# EAGLE board Matrix - Copy (EAGLE 8.2.2)
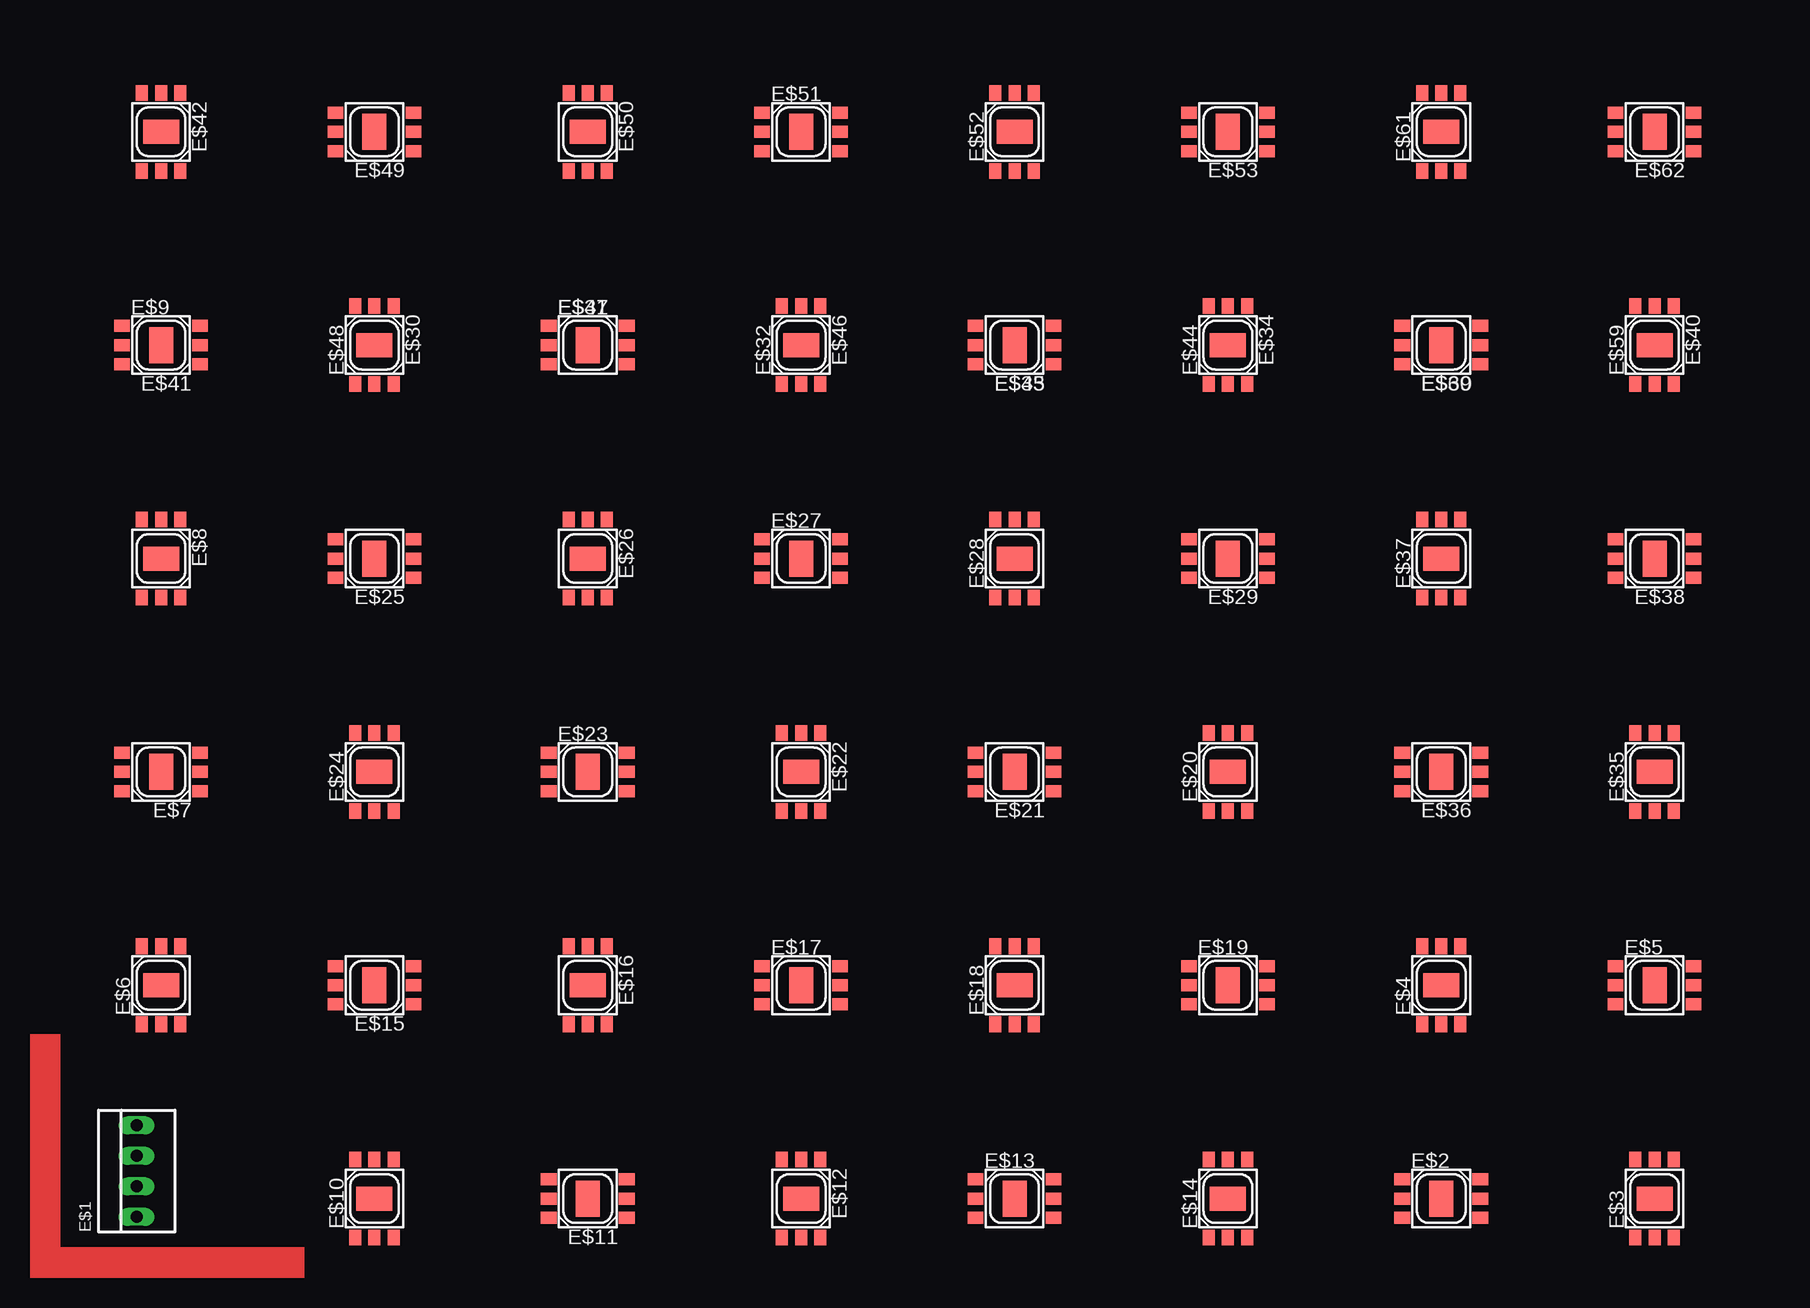
[diagram p0: board, top side]
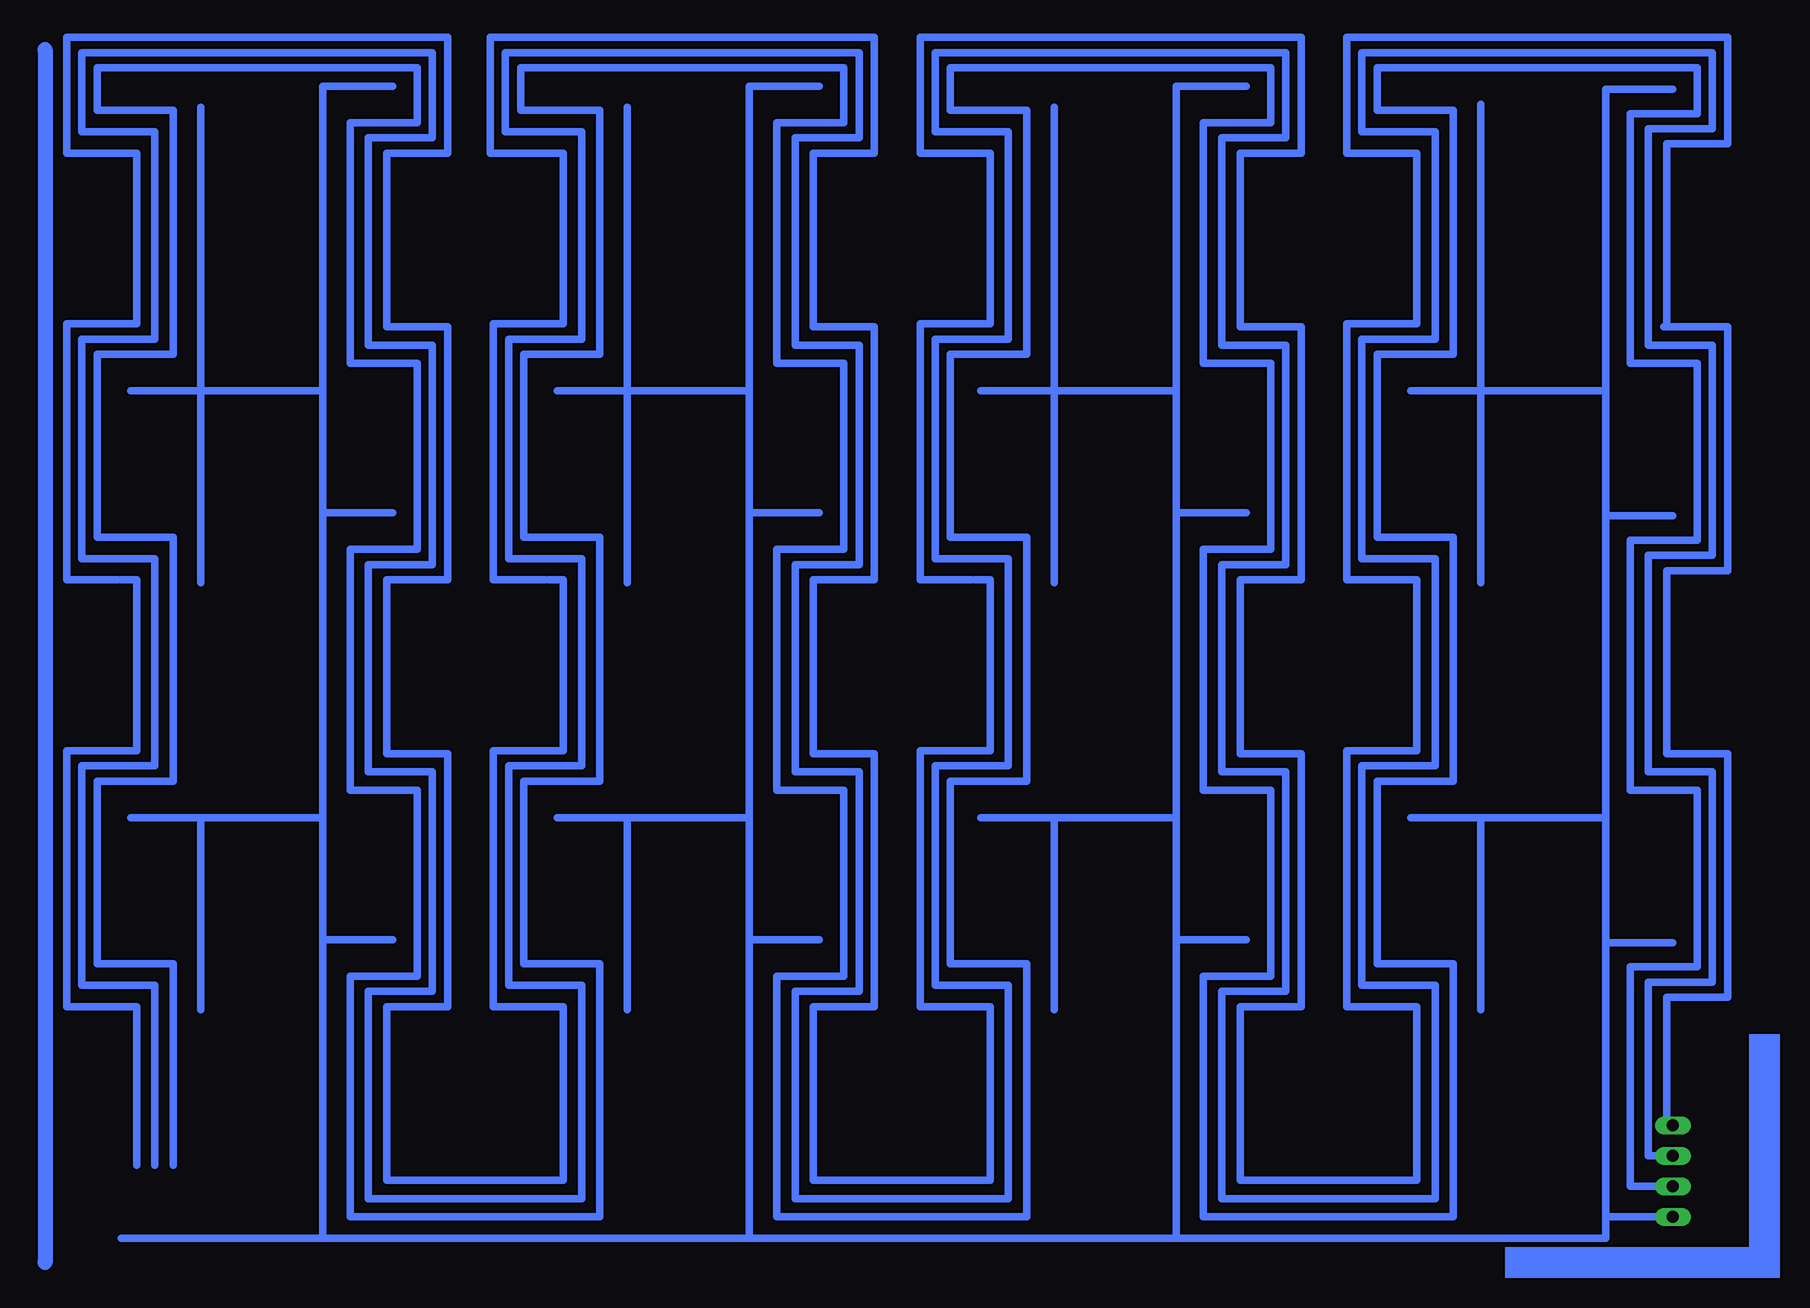
[diagram p1: board, bottom side, seen from below]

No outline drawn. Coordinates in mm, seen from the top.
Copper layers (1*16): Top 0.035mm / dielectric 1.5mm / Bottom 0.035mm
Design rules "default": minimum track width 10mil, minimum drill 24mil, track to track 8mil, track to pad 8mil, pad to pad 8mil, via to via 8mil, smd to smd 8mil, copper to edge 40mil, drill to drill 8mil, minimum pad ring 10mil, minimum via ring 8mil, stop-mask expansion 4mil, vias tented up to drill 0mil, thermal gap 10mil

## Footprints (pad centres in the part's own frame; a part is rotated, then mirrored left to right if it is on the bottom)
22-23-2041 = drill 1 long: 1 -3.81,0; 2 -1.27,0; 3 1.27,0; 4 3.81,0
LP2C63-ST-RGB-SR0 = smd 1.3 x 1: 1 -3.25,1.6; 2 -3.25,0; 3 -3.25,-1.6; 4 3.25,-1.6; 5 3.25,0; 6 3.25,1.6 | smd 2 x 3: TH 0,0

## Placement (x,y rotation side)
E$1  [22-23-2041]  8.89,8.89 90 top
E$2  [LP2C63-ST-RGB-SR0]  117.6,6.6 0 top
E$3  [LP2C63-ST-RGB-SR0]  135.38,6.6 90 top
E$4  [LP2C63-ST-RGB-SR0]  117.6,24.38 90 top
E$5  [LP2C63-ST-RGB-SR0]  135.38,24.38 0 top
E$6  [LP2C63-ST-RGB-SR0]  10.92,24.38 90 top
E$7  [LP2C63-ST-RGB-SR0]  10.92,42.16 180 top
E$8  [LP2C63-ST-RGB-SR0]  10.92,59.94 270 top
E$9  [LP2C63-ST-RGB-SR0]  10.92,77.72 0 top
E$10  [LP2C63-ST-RGB-SR0]  28.7,6.6 90 top
E$11  [LP2C63-ST-RGB-SR0]  46.48,6.6 180 top
E$12  [LP2C63-ST-RGB-SR0]  64.26,6.6 270 top
E$13  [LP2C63-ST-RGB-SR0]  82.04,6.6 0 top
E$14  [LP2C63-ST-RGB-SR0]  99.82,6.6 90 top
E$15  [LP2C63-ST-RGB-SR0]  28.7,24.38 180 top
E$16  [LP2C63-ST-RGB-SR0]  46.48,24.38 270 top
E$17  [LP2C63-ST-RGB-SR0]  64.26,24.38 0 top
E$18  [LP2C63-ST-RGB-SR0]  82.04,24.38 90 top
E$19  [LP2C63-ST-RGB-SR0]  99.82,24.38 0 top
E$20  [LP2C63-ST-RGB-SR0]  99.82,42.16 90 top
E$21  [LP2C63-ST-RGB-SR0]  82.04,42.16 180 top
E$22  [LP2C63-ST-RGB-SR0]  64.26,42.16 270 top
E$23  [LP2C63-ST-RGB-SR0]  46.48,42.16 0 top
E$24  [LP2C63-ST-RGB-SR0]  28.7,42.16 90 top
E$25  [LP2C63-ST-RGB-SR0]  28.7,59.94 180 top
E$26  [LP2C63-ST-RGB-SR0]  46.48,59.94 270 top
E$27  [LP2C63-ST-RGB-SR0]  64.26,59.94 0 top
E$28  [LP2C63-ST-RGB-SR0]  82.04,59.94 90 top
E$29  [LP2C63-ST-RGB-SR0]  99.82,59.94 180 top
E$30  [LP2C63-ST-RGB-SR0]  28.7,77.72 270 top
E$31  [LP2C63-ST-RGB-SR0]  46.48,77.72 0 top
E$32  [LP2C63-ST-RGB-SR0]  64.26,77.72 90 top
E$33  [LP2C63-ST-RGB-SR0]  82.04,77.72 180 top
E$34  [LP2C63-ST-RGB-SR0]  99.82,77.72 270 top
E$35  [LP2C63-ST-RGB-SR0]  135.38,42.16 90 top
E$36  [LP2C63-ST-RGB-SR0]  117.6,42.16 180 top
E$37  [LP2C63-ST-RGB-SR0]  117.6,59.94 90 top
E$38  [LP2C63-ST-RGB-SR0]  135.38,59.94 180 top
E$39  [LP2C63-ST-RGB-SR0]  117.6,77.72 180 top
E$40  [LP2C63-ST-RGB-SR0]  135.38,77.72 270 top
E$41  [LP2C63-ST-RGB-SR0]  10.92,77.72 180 top
E$42  [LP2C63-ST-RGB-SR0]  10.92,95.5 270 top
E$44  [LP2C63-ST-RGB-SR0]  99.82,77.72 90 top
E$45  [LP2C63-ST-RGB-SR0]  82.04,77.72 180 top
E$46  [LP2C63-ST-RGB-SR0]  64.26,77.72 270 top
E$47  [LP2C63-ST-RGB-SR0]  46.48,77.72 0 top
E$48  [LP2C63-ST-RGB-SR0]  28.7,77.72 90 top
E$49  [LP2C63-ST-RGB-SR0]  28.7,95.5 180 top
E$50  [LP2C63-ST-RGB-SR0]  46.48,95.5 270 top
E$51  [LP2C63-ST-RGB-SR0]  64.26,95.5 0 top
E$52  [LP2C63-ST-RGB-SR0]  82.04,95.5 90 top
E$53  [LP2C63-ST-RGB-SR0]  99.82,95.5 180 top
E$59  [LP2C63-ST-RGB-SR0]  135.38,77.72 90 top
E$60  [LP2C63-ST-RGB-SR0]  117.6,77.72 180 top
E$61  [LP2C63-ST-RGB-SR0]  117.6,95.5 90 top
E$62  [LP2C63-ST-RGB-SR0]  135.38,95.5 180 top

## Library data of the parts
E$1 = con-molex
E$2-E$42 E$44-E$53 E$59-E$62 = led

## Tracks (layer width: path | path; a pad name or v marks a point on that pad's centre or on a via)
S$1
  Bottom 1.27: 144.53,102.36 144.53,1.27
S$5
  Bottom 0.61: 30.23,79.5 36.07,79.5 36.07,58.17 30.23,58.17 30.23,44.96
S$6
  Bottom 0.61: 85.85,3.3 121.41,3.3 | 121.41,3.3 138.18,3.3 | 121.41,3.3 121.41,28.19 | 121.41,28.19 121.41,38.35 | 121.41,38.35 121.41,63.75 | 121.41,63.75 121.41,73.91 | 121.41,73.91 121.41,79.76 | 137.41,73.91 131.57,73.91 | 121.41,73.91 127.25,73.91 131.57,73.91 | 137.41,38.35 131.57,38.35 | 131.57,38.35 121.41,38.35 | 115.57,28.19 121.41,28.19 | 115.57,63.75 121.41,63.75 | 131.57,57.91 131.57,73.91 | 131.57,22.35 131.57,38.35 | 131.57,97.54 131.57,73.91
S$7
  Bottom 0.61: 114.3,8.13 116.08,8.13 116.08,21.08
S$8
  Bottom 0.61: 114.3,6.6 117.6,6.6 117.6,21.34
S$9
  Bottom 0.61: 114.3,5.08 119.13,5.08 119.13,21.34
S$10
  Bottom 0.61: 114.3,8.13 116.08,8.13
S$11
  Bottom 0.61: 111,23.37 111,43.69 114.81,43.69
S$12
  Bottom 0.61: 79.25,77.72 76.71,77.72 76.71,60.2
S$13
  Bottom 0.61: 78.74,8.13 80.52,8.13
S$14
  Bottom 0.61: 78.74,8.13 80.52,8.13 80.52,21.08
S$15
  Bottom 0.61: 78.74,6.6 82.04,6.6 82.04,21.34
S$16
  Bottom 0.61: 78.74,5.08 83.57,5.08 83.57,21.34
S$17
  Bottom 0.61: 7.62,43.69 9.4,43.69 9.4,58.93 4.32,58.93 4.32,79.25 9.65,79.25
S$18
  Bottom 0.61: 7.62,42.16 10.92,42.16 10.92,60.2 5.59,60.2 5.59,77.72 10.92,77.72
S$19
  Bottom 0.61: 7.62,40.64 12.45,40.64 12.45,61.47 6.86,61.47 6.86,76.2 12.19,76.2
S$20
  Bottom 0.61: 43.18,8.13 44.96,8.13 44.96,22.61 39.88,22.61 39.88,43.69 43.69,43.69
S$21
  Bottom 0.61: 43.18,6.6 46.48,6.6 46.48,23.88 41.15,23.88 41.15,42.16 43.69,42.16
S$22
  Bottom 0.61: 43.18,5.08 48.01,5.08 48.01,25.15 42.42,25.15 42.42,40.64 43.69,40.64
S$23
  Bottom 0.61: 43.18,43.69 44.96,43.69 44.96,58.17 39.88,58.17 39.88,79.25 43.69,79.25
S$24
  Bottom 0.61: 43.18,42.16 46.48,42.16 46.48,59.44 41.15,59.44 41.15,77.72 43.69,77.72
S$25
  Bottom 0.61: 43.18,40.64 48.01,40.64 48.01,60.71 42.42,60.71 42.42,76.2 43.69,76.2
S$26
  Bottom 0.61: 75.44,23.37 75.44,43.69 79.25,43.69
S$27
  Bottom 0.61: 78.74,6.6 82.04,6.6
S$28
  Bottom 0.61: 78.74,5.08 83.57,5.08
S$29
  Bottom 0.61: 75.44,58.93 75.44,79.25 79.25,79.25
S$30
  Bottom 0.61: 78.74,42.16 82.04,42.16
S$31
  Bottom 0.61: 79.25,76.2 77.98,76.2 77.98,61.47
S$32
  Bottom 0.61: 78.74,40.64 83.57,40.64
S$33
  Bottom 0.61: 28.7,78.23 34.8,78.23 34.8,59.94 28.7,59.94 28.7,44.96
S$34
  Bottom 0.61: 27.18,76.96 33.53,76.96 33.53,61.72 27.18,61.72 27.18,44.96
S$35
  Bottom 0.61: 39.88,79.25 44.96,79.25
S$36
  Bottom 0.61: 30.23,49.53 30.23,43.94 36.07,43.94 36.07,22.61 30.23,22.61 30.23,10.16 30.23,9.4 30.23,8.13 43.18,8.13 43.94,8.13 44.96,8.13 44.96,21.08
S$37
  Bottom 0.61: 28.7,48.26 28.7,42.67 34.8,42.67 34.8,24.38 28.7,24.38 28.7,9.91 28.7,9.4 28.7,6.6 43.18,6.6 43.69,6.6 46.48,6.6 46.48,21.34
S$38
  Bottom 0.61: 27.18,46.99 27.18,41.4 33.53,41.4 33.53,26.16 27.18,26.16 27.18,9.65 27.18,9.4 27.18,5.08 43.18,5.08 44.45,5.08 48.01,5.08 48.01,21.34
S$39
  Bottom 0.61: 30.23,44.96 30.23,49.53
S$41
  Bottom 0.61: 64.26,78.23 70.36,78.23 70.36,59.94 64.26,59.94 64.26,44.96
S$42
  Bottom 0.61: 62.74,76.96 69.09,76.96 69.09,61.72 62.74,61.72 62.74,44.96
S$43
  Bottom 0.61: 80.52,8.13 80.52,22.61 75.44,22.61 75.44,43.69 79.25,43.69
S$44
  Bottom 0.61: 82.04,6.6 82.04,23.88 76.71,23.88 76.71,42.16 79.25,42.16
S$45
  Bottom 0.61: 83.57,5.08 83.57,25.15 77.98,25.15 77.98,40.64 79.25,40.64
S$46
  Bottom 0.61: 78.74,43.69 80.52,43.69 80.52,58.17 75.44,58.17 75.44,79.25 79.25,79.25
S$47
  Bottom 0.61: 78.74,42.16 82.04,42.16 82.04,59.44 76.71,59.44 76.71,77.72 79.25,77.72
S$48
  Bottom 0.61: 78.74,40.64 83.57,40.64 83.57,60.71 77.98,60.71 77.98,76.2 79.25,76.2
S$49
  Bottom 0.61: 41.15,77.72 46.48,77.72
S$50
  Bottom 0.61: 80.52,21.08 80.52,8.13 65.79,8.13 65.79,22.61 71.63,22.61 71.63,43.94 65.79,43.94 65.79,44.96 65.79,45.59 65.79,58.17 67.06,58.17
S$51
  Bottom 0.61: 64.26,48.26 64.26,42.67 70.36,42.67 70.36,24.38 64.26,24.38 64.26,9.91 64.26,9.4 64.26,6.6 78.74,6.6 79.25,6.6 82.04,6.6 82.04,21.34
S$52
  Bottom 0.61: 78.74,43.69 80.52,43.69
S$53
  Bottom 0.61: 79.25,42.16 76.71,42.16 76.71,24.64
S$54
  Bottom 0.61: 79.25,40.64 77.98,40.64 77.98,25.91
S$55
  Bottom 0.61: 62.74,46.99 62.74,41.4 69.09,41.4 69.09,26.16 62.74,26.16 62.74,9.65 62.74,9.4 62.74,5.08 78.74,5.08 80.01,5.08 83.57,5.08 83.57,21.34
S$56
  Bottom 0.61: 102.87,58.17 107.19,58.17 107.19,79.5 101.35,79.5 101.35,80.52 101.35,81.41 101.35,93.73 102.62,93.73
S$57
  Bottom 0.61: 99.82,78.23 105.92,78.23 105.92,59.94 99.82,59.94 99.82,44.96
S$58
  Bottom 0.61: 50.29,3.3 14.48,3.3 14.48,5.08 | 50.29,3.3 85.85,3.3 | 85.85,3.3 102.62,3.3 | 14.48,5.08 14.48,27.94 | 14.48,27.94 14.48,38.35 | 14.48,38.35 14.48,63.5 | 14.48,63.5 14.48,73.91 | 14.48,73.91 14.48,79.76 | 30.48,73.91 24.89,73.91 | 24.89,73.91 14.48,73.91 | 30.73,38.35 24.89,38.35 | 24.89,38.35 14.48,38.35 | 50.29,3.3 50.29,28.19 | 50.29,28.19 50.29,38.35 | 50.29,38.35 50.29,63.75 | 50.29,63.75 50.29,73.91 | 50.29,73.91 50.29,80.01 | 66.29,73.91 60.45,73.91 | 60.45,73.91 50.29,73.91 | 66.55,38.35 60.45,38.35 | 60.45,38.35 50.29,38.35 | 85.85,3.3 85.85,28.19 | 85.85,28.19 85.85,38.35 | 85.85,38.35 85.85,63.75 | 85.85,63.75 85.85,73.91 | 85.85,73.91 85.85,79.76 | 101.85,73.91 96.01,73.91 | 85.85,73.91 91.44,73.91 96.01,73.91 | 101.85,38.35 96.01,38.35 | 96.01,38.35 85.85,38.35 | 8.89,63.5 14.48,63.5 | 8.89,27.94 14.48,27.94 | 24.89,22.35 24.89,38.35 | 24.89,58.17 24.89,73.91 | 44.45,63.75 50.29,63.75 | 44.45,28.19 50.29,28.19 | 60.45,22.35 60.45,38.35 | 60.45,57.91 60.45,73.91 | 80.01,28.19 85.85,28.19 | 80.01,63.75 85.85,63.75 | 96.01,57.91 96.01,73.91 | 96.01,22.35 96.01,38.35 | 8.89,5.08 14.48,5.08 | 60.45,97.54 60.45,73.91 | 96.01,97.54 96.01,73.91
S$59
  Bottom 0.61: 98.3,76.96 104.65,76.96 104.65,61.72 98.3,61.72 98.3,44.96
S$60
  Bottom 0.61: 114.81,42.16 112.27,42.16 112.27,24.64
S$61
  Bottom 0.61: 114.3,6.6 117.6,6.6
S$63
  Bottom 0.61: 114.81,40.64 113.54,40.64 113.54,25.91
S$64
  Bottom 0.61: 42.42,76.2 47.75,76.2
S$65
  Bottom 0.61: 101.35,9.4 101.35,22.61 107.19,22.61 107.19,43.94 101.35,43.94 101.35,44.96 101.35,46.48 101.35,58.17 102.62,58.17
S$66
  Bottom 0.61: 99.82,48.26 99.82,42.67 105.92,42.67 105.92,24.38 99.82,24.38 99.82,9.4
S$67
  Bottom 0.61: 98.3,46.99 98.3,41.4 104.65,41.4 104.65,26.16 98.3,26.16 98.3,9.4
S$68
  Bottom 0.61: 114.3,5.08 119.13,5.08
S$69
  Bottom 0.61: 114.3,43.69 116.08,43.69
S$70
  Bottom 0.61: 111,58.93 111,79.25 114.81,79.25
S$71
  Bottom 0.61: 114.81,77.72 112.27,77.72 112.27,60.2
S$72
  Bottom 0.61: 114.3,42.16 117.6,42.16
S$73
  Bottom 0.61: 114.81,76.2 113.54,76.2 113.54,61.47
S$74
  Bottom 0.61: 114.3,40.64 119.13,40.64
S$75
  Bottom 0.61: 116.08,8.13 116.08,22.61 111,22.61 111,43.69 114.81,43.69
S$76
  Bottom 0.61: 117.6,6.6 117.6,23.88 112.27,23.88 112.27,42.16 114.81,42.16
S$77
  Bottom 0.61: 119.13,5.08 119.13,25.15 113.54,25.15 113.54,40.64 114.81,40.64
S$78
  Bottom 0.61: 114.3,43.69 116.08,43.69 116.08,58.17 111,58.17 111,79.25 114.81,79.25
S$79
  Bottom 0.61: 114.3,42.16 117.6,42.16 117.6,59.44 112.27,59.44 112.27,77.72 114.81,77.72
S$80
  Bottom 0.61: 114.3,40.64 119.13,40.64 119.13,60.71 113.54,60.71 113.54,76.2 114.81,76.2
S$81
  Bottom 0.61: 116.08,21.08 116.08,8.13 115.06,8.13 114.3,8.13 101.35,8.13 101.35,9.4
S$82
  Bottom 0.61: 117.6,21.34 117.6,6.6 114.81,6.6 114.3,6.6 99.82,6.6 99.82,9.4
S$83
  Bottom 0.61: 119.13,21.34 119.13,5.08 115.57,5.08 114.3,5.08 98.3,5.08 98.3,9.4
S$84
  Bottom 0.61: 138.43,58.17 142.75,58.17 142.75,79.5 137.03,79.5 136.91,79.5 136.91,80.52 136.91,81.79 136.91,93.73 138.18,93.73
S$85
  Bottom 0.61: 135.38,78.23 141.48,78.23 141.48,59.94 135.38,59.94 135.38,44.96
S$86
  Bottom 0.61: 133.86,76.96 140.21,76.96 140.21,61.72 133.86,61.72 133.86,44.96
S$87
  Bottom 0.61: 76.71,77.72 82.04,77.72
S$88
  Bottom 0.61: 136.91,9.4 136.91,22.61 142.75,22.61 142.75,43.94 137.54,43.94 136.91,43.94 136.91,44.96 136.91,45.59 136.91,58.17 138.18,58.17
S$89
  Bottom 0.61: 135.38,48.26 135.38,42.67 141.48,42.67 141.48,24.38 135.38,24.38 135.38,9.4
S$90
  Bottom 0.61: 133.86,46.99 133.86,41.4 140.21,41.4 140.21,26.16 133.86,26.16 133.86,9.4
S$91
  Bottom 0.61: 77.98,76.2 83.31,76.2
S$92
  Bottom 0.61: 75.44,79.25 80.52,79.25
S$93
  Bottom 0.61: 111,79.25 116.08,79.25
S$94
  Bottom 0.61: 112.27,77.72 117.6,77.72
S$95
  Bottom 0.61: 113.54,76.2 118.87,76.2
S$96
  Bottom 0.61: 6.86,61.47 6.86,76.2 8.13,76.2
S$97
  Bottom 0.61: 5.59,60.2 5.59,77.72 8.13,77.72
S$98
  Bottom 0.61: 4.32,58.93 4.32,79.25 8.13,79.25
S$99
  Bottom 0.61: 85.85,63.75 85.85,73.91 | 85.85,73.91 85.85,99.31 80.01,99.31 | 101.85,73.91 96.01,73.91 | 96.01,73.91 85.85,73.91 | 96.01,57.91 96.01,73.91
S$100
  Bottom 0.61: 28.19,103.38 36.07,103.38 36.07,93.73 30.23,93.73 30.23,80.52
S$101
  Bottom 0.61: 7.62,79.25 9.4,79.25 9.4,94.49 4.32,94.49 4.32,103.38 31.5,103.38
S$102
  Bottom 0.61: 34.8,102.11 34.8,95.5 28.7,95.5 28.7,80.52
S$103
  Bottom 0.61: 7.62,77.72 10.92,77.72 10.92,95.76 5.59,95.76 5.59,102.11 34.8,102.11
S$104
  Bottom 0.61: 12.45,100.84 33.53,100.84 33.53,97.28 27.18,97.28 27.18,80.52
S$105
  Bottom 0.61: 7.62,76.2 12.45,76.2 12.45,97.03 6.86,97.03 6.86,100.84 12.45,100.84
S$106
  Bottom 0.61: 39.88,58.17 39.88,79.25 43.69,79.25
S$107
  Bottom 0.61: 41.15,59.44 41.15,77.72 43.69,77.72
S$108
  Bottom 0.61: 42.42,60.71 42.42,76.2 43.69,76.2
S$109
  Bottom 0.61: 43.18,79.25 44.96,79.25 44.96,93.73 39.88,93.73
S$110
  Bottom 0.61: 43.18,77.72 46.48,77.72 46.48,95 41.15,95
S$111
  Bottom 0.61: 43.18,76.2 48.01,76.2 48.01,96.27 42.42,96.27
S$112
  Bottom 0.61: 75.44,58.93 75.44,79.25 79.25,79.25
S$113
  Bottom 0.61: 79.25,77.72 76.71,77.72 76.71,60.2
S$114
  Bottom 0.61: 79.25,76.2 77.98,76.2 77.98,61.47
S$115
  Bottom 0.61: 78.74,79.25 80.52,79.25
S$116
  Bottom 0.61: 63.75,103.38 71.63,103.38 71.63,93.73 65.79,93.73
S$117
  Bottom 0.61: 44.96,93.73 39.88,93.73 39.88,103.38 67.06,103.38
S$118
  Bottom 0.61: 78.74,77.72 82.04,77.72
S$119
  Bottom 0.61: 70.36,102.11 70.36,95.5 64.26,95.5
S$120
  Bottom 0.61: 78.74,76.2 83.57,76.2
S$121
  Bottom 0.61: 30.23,85.09 30.23,79.5 36.07,79.5 36.07,58.17
S$122
  Bottom 0.61: 28.7,83.82 28.7,78.23 34.8,78.23 34.8,59.94
S$123
  Bottom 0.61: 27.18,82.55 27.18,76.96 33.53,76.96 33.53,61.72
S$124
  Bottom 0.61: 30.23,80.52 30.23,85.09
S$125
  Bottom 0.61: 46.48,95 41.15,95 41.15,102.11 70.36,102.11
S$126
  Bottom 0.61: 67.06,93.73 65.79,93.73 65.79,80.64 65.79,80.52 65.79,79.5 71.63,79.5 71.63,58.17 67.31,58.17
S$127
  Bottom 0.61: 30.73,73.91 24.89,73.91 | 24.89,57.91 24.89,73.91 | 8.89,99.06 14.48,99.06 14.48,73.91 | 14.48,73.91 14.99,73.91 24.89,73.91 | 14.48,63.5 14.48,73.91 | 24.89,97.79 24.89,73.91
S$128
  Bottom 0.61: 70.36,95.5 64.26,95.5 64.26,80.52
S$129
  Bottom 0.61: 48.01,100.84 69.09,100.84 69.09,97.28 62.74,97.28
S$130
  Bottom 0.61: 69.09,97.28 62.74,97.28 62.74,80.52
S$131
  Bottom 0.61: 75.44,58.17 75.44,79.25 79.25,79.25
S$132
  Bottom 0.61: 76.71,59.44 76.71,77.72 79.25,77.72
S$133
  Bottom 0.61: 77.98,60.71 77.98,76.2 79.25,76.2
S$134
  Bottom 0.61: 78.74,79.25 80.52,79.25 80.52,93.73 75.44,93.73
S$135
  Bottom 0.61: 78.74,77.72 82.04,77.72 82.04,95 76.71,95
S$136
  Bottom 0.61: 78.74,76.2 83.57,76.2 83.57,96.27 77.98,96.27
S$137
  Bottom 0.61: 65.79,79.5 71.63,79.5 71.63,58.17
S$138
  Bottom 0.61: 64.26,83.82 64.26,78.23 70.36,78.23 70.36,59.94
S$139
  Bottom 0.61: 62.74,82.55 62.74,76.96 69.09,76.96 69.09,61.72
S$140
  Bottom 0.61: 48.01,96.27 42.42,96.27 42.42,100.84 48.01,100.84
S$142
  Bottom 0.61: 99.57,103.38 107.44,103.38 107.44,93.73 101.6,93.73
S$143
  Bottom 0.61: 105.92,95.5 99.82,95.5 99.82,80.52
S$144
  Bottom 0.61: 80.52,93.73 75.44,93.73 75.44,103.38 102.87,103.38
S$145
  Bottom 0.61: 104.65,97.28 98.3,97.28 98.3,80.52
S$146
  Bottom 0.61: 101.35,79.5 107.19,79.5 107.19,58.17
S$147
  Bottom 0.61: 99.82,83.82 99.82,78.23 105.92,78.23 105.92,59.94
S$148
  Bottom 0.61: 98.3,82.55 98.3,76.96 104.65,76.96 104.65,61.72
S$149
  Bottom 0.61: 121.41,63.75 121.41,73.91 | 121.41,73.91 121.41,99.31 115.57,99.31 | 137.41,73.91 131.57,73.91 | 131.57,73.91 121.41,73.91 | 131.57,57.91 131.57,73.91
S$150
  Bottom 0.61: 111,58.93 111,79.25 114.81,79.25
S$151
  Bottom 0.61: 114.81,77.72 112.27,77.72 112.27,60.2
S$152
  Bottom 0.61: 114.81,76.2 113.54,76.2 113.54,61.47
S$153
  Bottom 0.61: 114.3,79.25 116.08,79.25
S$154
  Bottom 0.61: 106.17,102.11 106.17,95.5 100.08,95.5
S$155
  Bottom 0.61: 82.04,95 76.71,95 76.71,102.11 106.17,102.11
S$156
  Bottom 0.61: 114.3,77.72 117.6,77.72
S$157
  Bottom 0.61: 83.82,100.84 104.9,100.84 104.9,97.28 98.55,97.28
S$158
  Bottom 0.61: 114.3,76.2 119.13,76.2
S$159
  Bottom 0.61: 111,58.17 111,79.25 114.81,79.25
S$160
  Bottom 0.61: 112.27,59.44 112.27,77.72 114.81,77.72
S$161
  Bottom 0.61: 113.54,60.71 113.54,76.2 114.81,76.2
S$162
  Bottom 0.61: 114.3,79.25 116.08,79.25 116.08,93.73 111,93.73
S$163
  Bottom 0.61: 114.3,77.72 117.6,77.72 117.6,95 112.27,95
S$164
  Bottom 0.61: 114.3,76.2 119.13,76.2 119.13,96.27 113.54,96.27
S$165
  Bottom 0.61: 83.57,96.27 77.98,96.27 77.98,100.84 83.82,100.84
S$167
  Bottom 0.61: 134.87,103.38 142.75,103.38 142.75,93.73 136.91,93.73
S$168
  Bottom 0.61: 141.48,95.5 135.38,95.5 135.38,80.52
S$169
  Bottom 0.61: 116.08,93.73 111,93.73 111,103.38 138.18,103.38
S$170
  Bottom 0.61: 140.21,97.28 133.86,97.28 133.86,80.52
S$171
  Bottom 0.61: 136.91,79.5 142.75,79.5 142.75,58.17
S$172
  Bottom 0.61: 135.38,83.82 135.38,78.23 141.48,78.23 141.48,59.94
S$173
  Bottom 0.61: 133.86,82.55 133.86,76.96 140.21,76.96 140.21,61.72
S$174
  Bottom 0.61: 66.55,73.91 60.45,73.91 | 60.45,57.91 60.45,73.91 | 44.45,99.31 50.29,99.31 50.29,73.91 | 60.45,73.91 50.29,73.91 | 50.29,63.75 50.29,73.91
S$175
  Bottom 0.61: 141.48,102.11 141.48,95.5 135.38,95.5
S$176
  Bottom 0.61: 117.6,95 112.27,95 112.27,102.11 141.48,102.11
S$177
  Bottom 0.61: 119.13,100.84 140.21,100.84 140.21,97.28 133.86,97.28
S$178
  Bottom 0.61: 119.13,96.27 113.54,96.27 113.54,100.84 119.13,100.84
S$182
  Bottom 0.61: 142.75,93.73 138.43,93.73
S$183
  Bottom 0.61: 107.19,93.73 102.87,93.73
S$184
  Bottom 0.61: 71.63,93.73 67.31,93.73
S$190
  Bottom 0.61: 8.13,42.16 5.59,42.16 5.59,24.64 10.92,24.64 10.92,10.16 8.89,10.16
S$191
  Bottom 0.61: 8.13,40.64 6.86,40.64 6.86,25.91 12.45,25.91 12.45,7.62 8.89,7.62
S$192
  Bottom 0.406: 9.4,12.7 8.76,12.7
  Bottom 0.61: 8.13,43.69 4.32,43.69 4.32,23.37 9.4,23.37 9.4,12.7
(copper drawn outside any net)
  shapes: Bottom area x3, Top area x2